# Altium PCB final_sensor_pcb.PcbDoc (part 3 of 3)
Units mm, origin at the board's own origin, x right, y up, seen from the top; angles counter-clockwise.
Board outline 100.5 x 21.64 mm, 2 copper layers (Top Layer, Bottom Layer); 86 components, 53 nets, 234 pads, 76 vias.
Unrouted connection lines stored in the file: 1.
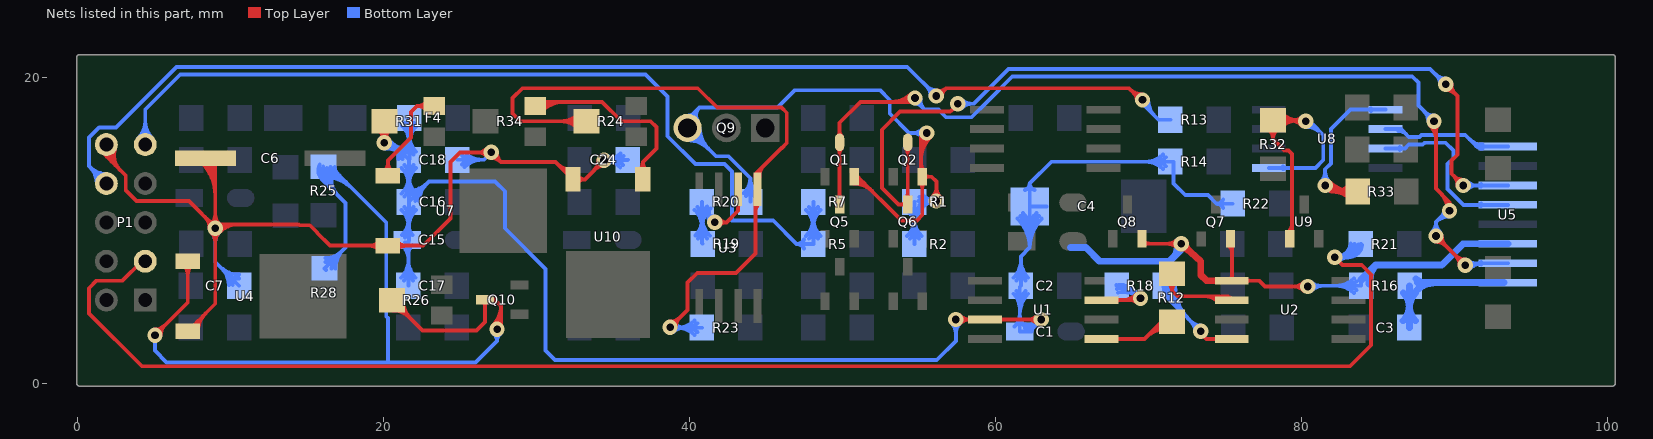
[diagram p3: the nets of this part, all layers, seen from the top]

## Via types
v1: diameter 1, hole 0.5, Top Layer to Bottom Layer, 76 vias

## Nets (pads, with @x,y where several pads share a name; then routed paths per layer and width w, separated by ;. In a path a pad name is that pad's centre, name@x,y a point inside that pad or via, vN(x,y) a via of type N, cw(c..) or ccw(c..) an arc to the next point about the centre after c; other vN are vias at no path point) (continued)
NetQ10_3: Q10.3 R25.1 R26.2 R28.2 U4.1 | length 93.6
  Top Layer w0.254: v1@5.08,3.548 ccw(c5.08,4.448) 5.717,3.812 ccw(c6.353,3.175) v1@5.453,3.175 ; v1@5.269,3.364 7.222,5.317 U4.1@7.222,8 ; U4.1@6.958,7.736 cw(c6.321,7.099) 7.222,7.099 cw(c8.122,7.099) U4.1@7.486,7.736 ; R26.2@20.575,5.461 22.502,3.534 ; R26.2@20.625,4.788 cw(c20.625,3.284) 21.689,4.347 ; R26.2@20.625,5.042 cw(c20.625,4.151) R26.2@21.255,4.781 ; R26.2@21.044,5.461 ccw(c22.176,5.461) 21.376,4.66 ; R26.2@21.298,5.461 ccw(c23.043,5.461) 21.809,4.227 ; 22.556,3.48 26.086,3.48 26.644,4.038 Q10.3@26.644,5.492 26.675,5.461 27.305,5.461 ; Q10.3@26.522,5.37 cw(c26.226,5.074) 26.644,5.074 cw(c27.062,5.074) Q10.3@26.766,5.37 ; Q10.3@26.878,5.562 cw(c27.034,5.298) 27.251,5.515 ; Q10.3@26.919,5.573 cw(c26.919,4.911) 27.387,5.379 ; Q10.3@27.007,5.343 cw(c27.206,5.007) 27.482,5.284 ; Q10.3@27.041,5.37 cw(c27.262,5.149) 27.262,5.461 ; Q10.3@27.062,5.589 ccw(c27.305,5.755) 27.305,5.461 ; v1@27.168,3.82 ccw(c25.918,5.07) 27.686,5.07 ; v1@27.348,3.64 ccw(c26.532,4.456) 27.686,4.456 ; v1(27.432,3.556) 27.559,3.429 27.686,3.556 27.686,5.08 27.305,5.461
  Bottom Layer w0.254: v1@5.08,3.048 5.08,2.159 5.842,1.397 26.035,1.397 27.432,2.794 ; R25.1@15.844,14.321 ccw(c16.636,13.942) 16.015,13.322 ; R25.1@16.073,14.212 ccw(c16.98,13.778) 16.269,13.068 ; R25.1@16.154,13.5 cw(c16.154,10.892) 17.998,12.736 ; R25.1@16.154,13.754 cw(c16.154,11.76) 17.564,13.17 ; R25.1@16.154,14.008 cw(c16.154,12.627) 17.13,13.604 ; R28.2@16.204,7.951 ccw(c16.204,8.842) R28.2@16.834,8.212 ; R28.2@16.204,8.205 ccw(c16.204,9.709) 17.268,8.645 ; R28.2@16.255,7.431 R28.2@16.154,7.532 17.526,8.903 17.526,11.811 16.002,13.335 16.561,13.894 16.561,14.173 20.193,10.541 20.193,4.401 20.312,4.282 20.312,1.405 ; R25.1@16.302,14.102 ccw(c17.323,13.614) 16.523,12.814 ; R25.1@16.532,13.992 ccw(c17.667,13.45) 16.777,12.56 ; R28.2@16.623,7.532 cw(c17.756,7.532) 16.955,8.332 ; R25.1@16.761,13.883 ccw(c18.011,13.285) 17.031,12.306 ; R25.1@16.827,14.173 ccw(c17.468,14.173) 17.015,13.719 ; R28.2@16.877,7.532 cw(c18.623,7.532) 17.389,8.766 ; v1@27.203,3.261 cw(c26.84,2.794) 27.432,2.794 ; v1@27.432,3.429 27.432,2.794 ; v1@27.661,3.261 ccw(c28.024,2.794) 27.432,2.794
  other v1: 5.08,3.175
NetR12_1: R12.1 U2.2 | length 8.4
  Top Layer w0.254: R12.1@71.206,6.608 cw(c70.915,6.071) 71.526,6.071 ; R12.1@71.526,7.2 71.526,6.071 ; R12.1@71.847,6.608 ccw(c72.138,6.071) 71.526,6.071 ; 73.678,5.715 cw(c73.678,4.551) U2.2@74.501,5.374 ; 74.291,5.715 cw(c74.291,5.164) U2.2@74.681,5.554 ; U2.2@75.315,5.461 ccw(c75.018,5.461) 75.228,5.671 ccw(c75.438,5.881) U2.2@75.438,5.584 ; U2.2@75.438,5.461 75.184,5.715 71.882,5.715 71.526,6.071
NetR18_1: R18.1 U2.4 | length 14.8
  Top Layer w0.254: v1(73.406,3.429) 73.406,3.302 73.787,2.921 U2.4@75.438,2.921 ; U2.4@74.501,2.834 ccw(c74.291,2.624) 74.291,2.921 ccw(c74.291,3.218) U2.4@74.501,3.008
  Bottom Layer w0.254: R18.1@70.98,6.351 ccw(c72.177,6.351) 71.331,5.504 ; R18.1@71.069,6.401 71.069,5.766 v1(73.406,3.429) ; R18.1@71.234,6.351 ccw(c73.044,6.351) 71.764,5.071 ; R18.1@71.488,6.351 ccw(c73.912,6.351) 72.198,4.637 ; R18.1@71.742,6.351 ccw(c74.779,6.351) 72.632,4.203 ; v1@73.033,3.429 ccw(c72.133,3.429) 72.769,4.066 ccw(c73.406,4.702) v1@73.406,3.802
NetR19_2: R19.2 R20.1 U3.6 | length 20.4
  Top Layer w0.254: v1(41.656,10.541) 42.418,10.541 ; v1@41.951,10.312 cw(c42.418,9.949) 42.418,10.541 ; v1@41.951,10.77 ccw(c42.418,11.133) 42.418,10.541 ; U3.6@43.093,11.759 cw(c42.883,11.549) 43.18,11.549 cw(c43.477,11.549) U3.6@43.267,11.759 ; U3.6@43.18,12.696 43.18,11.303 42.418,10.541
  Bottom Layer w0.254: R20.1@40.342,11.361 cw(c39.193,10.212) 40.818,10.212 cw(c42.443,10.212) R20.1@41.294,11.361 ; R19.2@40.379,9.67 ccw(c39.321,10.729) 40.818,10.729 ; R20.1@40.522,11.541 cw(c39.806,10.826) 40.818,10.826 cw(c41.829,10.826) R20.1@41.114,11.541 ; R19.2@40.559,9.49 ccw(c39.934,10.115) 40.818,10.115 ; 40.818,10.296 ccw(c41.957,10.296) R19.2@41.151,9.49 ; 40.818,10.909 ccw(c42.57,10.909) R19.2@41.331,9.67 ; R20.1@40.818,11.164 cw(c40.818,10.645) 41.185,11.012 ; R20.1@40.818,11.76 R20.1@40.818,11.887 R20.1@40.818,11.379 ; R19.2@40.855,9.144 40.818,9.181 R20.1@40.818,11.379 ; R20.1@41.161,11.596 ccw(c41.551,11.321) 41.213,10.984 ; v1@41.283,10.541 ccw(c40.383,10.541) 41.019,11.178 ccw(c41.656,11.814) v1@41.656,10.914 ; R20.1@41.368,11.45 ccw(c41.802,11.145) v1@41.427,10.77 ; v1(41.656,10.541) R20.1@40.818,11.379
NetR23_1: R23.1 R24.2 U3.5 | length 58.9
  Top Layer w0.254: 28.448,18.669 28.448,17.653 28.956,17.145 R24.2@33.275,17.145 ; 28.451,18.669 29.086,19.304 40.545,19.304 41.815,18.034 46.026,18.034 46.355,17.705 46.355,15.721 46.041,15.407 46.014,15.407 44.45,13.843 ; R24.2@32.749,16.669 ccw(c31.6,15.52) 31.6,17.145 ccw(c31.6,18.77) R24.2@32.749,17.621 ; R24.2@32.929,16.849 ccw(c32.213,16.133) 32.213,17.145 ccw(c32.213,18.157) R24.2@32.929,17.441 ; v1(38.735,3.683) 39.878,4.826 39.878,6.604 40.513,7.239 43.053,7.239 44.323,8.509 44.323,12.569 U3.5@44.45,12.696 44.45,13.843 ; v1@38.735,4.056 ccw(c38.735,4.956) 39.372,4.32 ccw(c40.008,3.683) v1@39.108,3.683 ; U3.5@44.319,13.546 cw(c44.72,13.546) 44.436,13.829 ; 44.323,11.242 cw(c45.054,11.242) U3.5@44.537,11.759 ; U3.5@44.363,13.633 ccw(c44.153,13.843) 44.45,13.843 ; U3.5@44.537,13.633 cw(c44.747,13.843) 44.45,13.843 ; U3.5@44.573,13.546 cw(c45.587,13.546) 44.87,14.263
  Bottom Layer w0.254: v1(38.735,3.683) 38.76,3.658 R23.1@40.818,3.658 ; v1@38.999,3.419 cw(c39.574,2.844) 39.574,3.658 ; v1@38.999,3.947 ccw(c39.697,4.645) 39.697,3.658 ; R23.1@40.342,3.182 ccw(c39.193,2.033) 39.193,3.658 ccw(c39.193,5.282) R23.1@40.342,4.134 ; R23.1@40.522,3.361 ccw(c39.806,2.646) 39.806,3.658 ccw(c39.806,4.669) R23.1@40.522,3.954
NetR31_3: R31.3 U7.1 | length 9.3
  Top Layer w0.254: U7.1@20.039,13.852 ccw(c19.402,14.488) 20.303,14.488 ccw(c21.203,14.488) U7.1@20.567,13.852 ; U7.1@20.303,13.588 20.303,14.588 21.809,16.094 21.809,17.745 22.209,18.145 ; R31.3@22.853,17.843 ccw(c22.209,17.307) 22.209,18.145 ; R31.3@22.853,18.447 cw(c22.209,18.983) 22.209,18.145 ; R31.3@23.317,18.145 22.209,18.145
NetR32_1: R32.1 U8.5 U9.1 | length 27.7
  Top Layer w0.254: R32.1@77.762,16.658 cw(c77.316,15.977) 78.13,15.977 ; R32.1@78.477,16.925 cw(c79.192,16.21) 79.192,17.221 cw(c79.192,18.233) R32.1@78.477,17.517 ; R32.1@78.499,16.658 ccw(c78.945,15.977) 78.13,15.977 ; R32.1@78.656,16.745 cw(c79.805,15.596) 79.805,17.221 cw(c79.805,18.846) R32.1@78.656,17.697 ; U9.1@79.096,9.857 ccw(c78.454,10.499) 79.361,10.499 ; 79.18,17.221 cw(c79.18,16.061) v1@80,16.881 ; U9.1@79.218,9.46 79.361,9.603 79.361,15.016 79.138,15.239 78.868,15.239 78.13,15.977 ; 79.547,17.221 ccw(c79.547,17.862) v1@80,17.409 ; v1@80.188,17.221 R32.1@78.13,17.221 78.13,15.977
  Bottom Layer w0.254: U8.5@77.855,14.097 80.899,14.097 81.407,14.605 81.407,16.256 80.772,16.891 80.518,16.891 v1(80.264,17.145) ; U8.5@78.792,14.01 cw(c79.002,13.8) 79.002,14.097 cw(c79.002,14.394) U8.5@78.792,14.184 ; v1@80.264,16.772 cw(c80.264,15.258) 81.334,16.329 ; v1@80.264,17.026 cw(c80.264,16.126) 80.901,16.762
NetR33_2: R33.2 U8.1 | length 20.2
  Top Layer w0.254: v1@81.439,12.859 ccw(c82.189,13.609) 82.189,12.548 ; v1(81.534,12.954) 81.94,12.548 R33.2@83.654,12.548 ; v1@81.618,13.038 ccw(c82.802,14.222) 82.802,12.548 ; v1@81.798,13.218 ccw(c83.416,14.836) R33.2@83.416,12.548 ; R33.2@83.178,12.072 ccw(c82.029,10.923) 82.029,12.548 ccw(c82.029,14.172) R33.2@83.178,13.023 ; R33.2@83.358,12.251 ccw(c82.643,11.536) 82.643,12.548 ccw(c82.643,13.559) R33.2@83.358,12.844
  Bottom Layer w0.254: v1@81.27,13.218 ccw(c80.634,13.854) 81.534,13.854 ccw(c82.434,13.854) v1@81.798,13.218 ; v1(81.534,12.954) 81.534,14.014 81.915,14.395 81.915,16.637 83.185,17.907 U8.1@85.471,17.907 ; U8.1@84.534,17.82 ccw(c84.324,17.61) 84.324,17.907 ccw(c84.324,18.204) U8.1@84.534,17.994
NetR34_3: R34.3 U10.1 | length 16.5
  Top Layer w0.254: R34.3@29.996,18.17 cw(c30.588,17.578) R34.3@30.588,18.415 ; R34.3@30.176,17.99 cw(c31.202,16.964) 31.202,18.415 ; R34.3@30.355,17.811 cw(c31.815,16.351) 31.815,18.415 ; R34.3@30.48,18.288 30.607,18.415 34.29,18.415 35.56,17.145 37.465,17.145 37.846,16.764 37.846,15.367 36.956,14.477 ; U10.1@36.71,13.932 ccw(c36.23,14.477) 36.956,14.477 ; U10.1@36.956,13.352 36.956,14.477 ; U10.1@37.202,13.932 cw(c37.682,14.477) 36.956,14.477
OFFSET+: Q1.3 Q5.3 U5.2 | length 82.2
  Top Layer w0.254: Q5.3@49.693,12.107 ccw(c49.398,12.403) 49.815,12.403 ccw(c50.233,12.403) Q5.3@49.937,12.107 ; Q1.3@49.693,15.377 cw(c49.397,15.081) 49.815,15.081 cw(c50.233,15.081) Q1.3@49.937,15.377 ; Q1.3@49.693,16.171 ccw(c49.397,16.467) 49.815,16.467 ccw(c50.233,16.467) Q1.3@49.937,16.171 ; Q5.3@49.815,11.71 Q1.3@49.815,15.774 49.815,17.049 51.181,18.415 54.61,18.415 v1@54.737,18.542 ; 53.223,18.415 ccw(c53.223,20.183) v1@54.473,18.933 ; 53.837,18.415 ccw(c53.837,19.569) v1@54.653,18.753 ; v1@88.382,16.881 cw(c87.439,15.938) 88.773,15.938 ; v1@88.562,17.061 cw(c88.052,16.551) 88.773,16.551 cw(c89.24,16.551) v1@88.91,16.881 ; v1@88.773,9.279 cw(c88.773,8.379) 89.41,9.015 cw(c90.046,9.652) v1@89.146,9.652 ; v1(88.773,9.652) v1(90.678,7.747) ; v1@88.773,17.256 88.773,12.744 89.662,11.855 v1(89.662,11.303) ; 89.069,12.448 cw(c87.924,11.303) v1@89.543,11.303 ; 89.502,12.014 cw(c88.791,11.303) v1@89.797,11.303 ; v1@90.305,7.747 ccw(c89.405,7.747) 90.041,8.384 ccw(c90.678,9.02) v1@90.678,8.12
  Bottom Layer w0.254: v1@54.737,18.296 cw(c54.737,17.702) 55.157,18.122 ; v1@54.737,18.542 55.372,17.907 56.261,17.907 56.761,17.407 58.428,17.407 59.436,18.415 ; v1@55.105,18.607 ccw(c55.824,18.486) 55.308,17.971 ; 59.499,18.479 59.436,18.415 ; v1@88.273,17.145 ccw(c87.373,17.145) 88.009,17.782 ccw(c88.646,18.418) v1@88.646,17.518 ; v1@88.509,9.916 ccw(c87.873,10.552) 88.773,10.552 ccw(c89.673,10.552) v1@89.037,9.916 ; v1(88.646,17.145) 87.622,18.169 87.622,19.669 87.225,20.066 61.087,20.066 59.436,18.415 ; 88.767,10.559 cw(c89.662,9.665) v1@89.662,10.93 ; v1(88.773,9.652) 88.773,10.565 v1@89.586,11.379 ; 89.132,10.924 ccw(c88.753,11.303) v1@89.289,11.303 ; 89.201,10.993 cw(c89.662,10.532) v1@89.662,11.184 ; v1(90.678,7.747) 90.551,7.874 U5.2@93.472,7.874 ; v1@90.762,7.663 cw(c91.272,7.153) 91.272,7.874 cw(c91.272,8.341) v1@90.942,8.011 ; v1@90.942,7.483 cw(c91.885,6.54) U5.2@91.885,7.874 ; U5.2@91.73,7.787 ccw(c91.52,7.577) 91.52,7.874 ccw(c91.52,8.171) U5.2@91.73,7.961
  other v1: 54.737,18.669
OFFSET-: Q2.3 Q6.3 U5.6 | length 69
  Top Layer w0.254: Q6.3@54.138,11.588 ccw(c53.842,11.292) 53.842,11.71 ccw(c53.842,12.128) Q6.3@54.138,11.832 ; Q6.3@54.138,12.107 ccw(c53.842,12.403) 54.26,12.403 ccw(c54.678,12.403) Q6.3@54.382,12.107 ; Q2.3@54.138,15.377 cw(c53.842,15.081) 54.26,15.081 cw(c54.678,15.081) Q2.3@54.382,15.377 ; Q6.3@54.26,11.71 53.651,11.71 52.578,12.783 52.578,16.593 53.765,17.78 57.007,17.78 57.015,17.772 v1@57.515,18.145 ; Q6.3@54.26,11.71 Q2.3@54.26,15.774 ; v1@89.408,19.185 cw(c89.408,18.285) 90.045,18.921 cw(c90.681,19.558) v1@89.781,19.558 ; v1(89.408,19.558) 90.17,18.796 90.17,14.962 89.789,14.581 89.789,13.716 v1(90.551,12.954) v1@90.297,13.208 ; v1@90.178,12.954 ccw(c89.278,12.954) 89.914,13.591 ccw(c90.551,14.227) v1@90.551,13.327
  Bottom Layer w0.254: v1(57.531,18.288) 58.547,18.288 60.833,20.574 88.392,20.574 v1(89.408,19.558) ; v1@57.795,18.024 cw(c58.431,17.388) 58.431,18.288 cw(c58.431,19.188) v1@57.795,18.552 ; v1@89.035,19.558 ccw(c88.135,19.558) 88.771,20.195 ccw(c89.408,20.831) v1@89.408,19.931 ; v1(90.551,12.954) U5.6@93.472,12.954 ; v1@90.815,12.69 cw(c91.451,12.054) 91.451,12.954 cw(c91.451,13.854) v1@90.815,13.218 ; U5.6@91.73,12.867 ccw(c91.52,12.657) 91.52,12.954 ccw(c91.52,13.251) U5.6@91.73,13.041
OP_OUT: Q1.2 Q2.2 Q9.3 R1.2 R2.2 R20.2 | length 78.5
  Top Layer w0.254: Q1.2@50.765,13.076 cw(c50.765,11.446) 51.917,12.599 ; Q1.2@50.765,13.33 cw(c50.765,12.314) 51.484,13.032 ; Q1.2@50.765,13.524 50.992,13.524 53.848,10.668 54.864,10.668 55.21,11.014 Q2.2@55.21,13.524 ; Q1.2@50.765,13.584 cw(c50.765,13.181) Q1.2@51.05,13.466 ; Q2.2@55.088,13.127 cw(c54.792,12.831) 55.21,12.831 cw(c55.628,12.831) Q2.2@55.332,13.127 ; 55.118,14.439 ccw(c55.85,14.439) Q2.2@55.332,13.921 ; 55.118,14.563 cw(c57.319,14.563) v1@55.763,16.119 ; 55.118,15.176 cw(c56.706,15.176) v1@55.583,16.299 ; 55.118,15.789 cw(c56.093,15.789) v1@55.404,16.478 ; v1@55.118,16.129 55.118,13.616 Q2.2@55.21,13.524 ; Q2.2@55.332,13.402 cw(c55.628,13.106) 55.628,13.524 cw(c55.628,13.942) Q2.2@55.332,13.646 ; v1@55.87,12.202 ccw(c55.234,12.838) 56.134,12.838 ccw(c57.034,12.838) v1@56.398,12.202 ; v1(56.134,11.938) 56.134,13.208 55.818,13.524 Q2.2@55.21,13.524
  Bottom Layer w0.254: Q9.3@39.878,15.915 cw(c39.878,13.988) 41.24,15.351 cw(c42.603,16.713) Q9.3@40.676,16.713 ; Q9.3@39.878,16.169 cw(c39.878,14.856) 40.807,15.784 cw(c41.735,16.713) Q9.3@40.422,16.713 ; Q9.3@39.878,17.018 Q9.3@39.878,16.713 ; Q9.3@39.878,17.511 ccw(c39.878,18.088) 40.286,17.68 ; Q9.3@40.121,16.871 cw(c40.603,17.184) 40.197,17.591 ; Q9.3@40.334,17.01 cw(c40.872,17.359) 40.418,17.812 ; Q9.3@40.547,17.148 cw(c41.14,17.534) 40.64,18.034 ; R20.2@43.537,12.443 ccw(c42.677,13.423) 43.981,13.423 ; R20.2@43.704,12.252 ccw(c43.169,12.862) 43.981,12.862 ccw(c44.793,12.862) R20.2@44.257,12.252 ; R20.2@43.981,11.887 43.981,13.423 ; R20.2@44.425,12.443 cw(c45.285,13.423) 43.981,13.423 ; R2.2@54.222,9.654 ccw(c53.073,10.802) 54.698,10.802 ccw(c56.323,10.802) R2.2@55.174,9.654 ; R1.2@54.222,11.361 cw(c53.073,10.212) 54.698,10.212 cw(c56.323,10.212) R1.2@55.174,11.361 ; R2.2@54.402,9.474 ccw(c53.687,10.189) 54.698,10.189 ccw(c55.71,10.189) R2.2@54.994,9.474 ; R1.2@54.402,11.541 cw(c53.687,10.826) 54.698,10.826 cw(c55.71,10.826) R1.2@54.994,11.541 ; R2.2@54.698,9.128 R1.2@54.698,11.887 ; R1.2@54.952,11.938 v1(56.134,11.938) ; R1.2@55.021,11.669 cw(c55.593,11.194) 55.593,11.938 ; R1.2@55.02,12.206 ccw(c55.591,12.682) 55.591,11.938 ; v1@55.118,16.383 54.356,16.383 53.086,17.653 53.086,18.542 52.451,19.177 46.907,19.177 45.764,18.034 40.64,18.034 ; R1.2@55.215,12.368 ccw(c56.134,13.134) v1(56.134,11.938) ; R1.2@55.216,11.507 cw(c56.134,10.745) v1(56.134,11.938) ; v1@55.235,16.119 ccw(c54.599,15.483) 54.599,16.383 ccw(c54.599,17.283) v1@55.235,16.647 ; v1@55.87,11.674 ccw(c55.234,11.038) 55.234,11.938 ccw(c55.234,12.838) v1@55.87,12.202 ; Q9.3@39.878,16.713 41.732,14.859 42.545,14.859 43.981,13.423 ; Q9.3@39.878,16.713 39.878,17.272 40.64,18.034
  other v1: 55.499,16.383
OUT_N: U5.8 U8.2 | length 12.8
  Bottom Layer w0.254: U8.2@85.471,16.637 86.487,16.637 86.995,16.129 87.698,16.129 87.817,16.248 90.686,16.248 91.44,15.494 U5.8@93.472,15.494 U5.8@91.694,15.494 ; U8.2@86.321,16.514 cw(c86.321,15.816) 86.814,16.31 ; 90.963,15.971 ccw(c91.817,16.824) U5.8@91.817,15.617 ; 91.397,15.537 ccw(c91.817,15.957) U5.8@91.817,15.363 ; U5.8@91.73,15.407 ccw(c91.52,15.197) 91.52,15.494 ccw(c91.52,15.791) U5.8@91.73,15.581
OUT_P: U5.5 U8.3 | length 12.8
  Bottom Layer w0.254: U8.3@85.471,15.367 86.741,15.367 86.995,15.621 87.908,15.621 88.027,15.74 89.416,15.74 89.916,15.24 89.916,14.732 89.535,14.351 89.535,12.724 90.575,11.684 U5.5@93.472,11.684 ; U8.3@86.408,15.28 cw(c86.618,15.07) 86.618,15.367 cw(c86.618,15.664) U8.3@86.408,15.454 ; U5.5@91.73,11.597 ccw(c91.52,11.387) 91.52,11.684 ccw(c91.52,11.981) U5.5@91.73,11.771
OUT_RESET: R12.2 U1.5 | length 9.7
  Top Layer w0.254: U1.5@66.925,2.921 69.723,2.921 70.839,4.037 R12.2@71.526,4.037 ; U1.5@67.862,2.834 cw(c68.072,2.624) 68.072,2.921 cw(c68.072,3.218) U1.5@67.862,3.008 ; 69.801,2.999 cw(c71.309,1.49) R12.2@71.449,3.619 ; 70.197,3.395 cw(c71.358,2.234) R12.2@71.466,3.873 ; 70.594,3.792 cw(c71.407,2.978) R12.2@71.482,4.126
OUT_SET: R18.2 U1.7 | length 12.5
  Top Layer w0.254: U1.7@66.925,5.461 69.342,5.461 v1(69.469,5.588) ; U1.7@67.862,5.374 cw(c68.072,5.164) 68.072,5.461 cw(c68.072,5.758) U1.7@67.862,5.548 ; 68.262,5.461 ccw(c68.262,6.795) v1@69.205,5.852 ; v1@69.205,5.324 ccw(c68.875,4.994) 68.875,5.461 ccw(c68.875,6.182) v1@69.385,5.672
  Bottom Layer w0.254: R18.2@67.885,6.437 cw(c68.14,5.381) 68.908,6.149 ; R18.2@67.906,6.401 68.656,6.401 v1(69.469,5.588) ; R18.2@67.945,6.19 cw(c68.264,4.865) v1@69.228,5.829 ; R18.2@68.004,5.943 cw(c68.389,4.348) v1@69.549,5.508 ; v1@69.096,5.588 ccw(c68.196,5.588) 68.832,6.225 ccw(c69.469,6.861) v1@69.469,5.961
P_CURRENT: P1.9 R5.2 R7.2 | length 70.9
  Bottom Layer w0.254: P1.9@4.004,16.062 ccw(c2.941,17.125) 4.445,17.125 ccw(c5.949,17.125) P1.9@4.886,16.062 ; P1.9@4.184,15.882 ccw(c3.554,16.512) 4.445,16.512 ccw(c5.336,16.512) P1.9@4.706,15.882 ; P1.9@4.445,15.621 4.445,17.907 6.731,20.193 37.139,20.193 38.572,18.76 38.572,16.165 40.386,14.351 42.291,14.351 42.787,13.855 42.787,10.656 45.478,10.656 47.006,9.128 ; R5.2@47.492,8.827 ccw(c47.006,8.585) 47.006,9.128 ; R5.2@47.492,9.428 cw(c47.006,9.67) 47.006,9.128 ; R5.2@47.618,9.654 ccw(c46.469,10.802) 48.094,10.802 ccw(c49.719,10.802) R5.2@48.57,9.654 ; R7.2@47.618,11.361 cw(c46.469,10.212) 48.094,10.212 cw(c49.719,10.213) R7.2@48.57,11.361 ; R5.2@47.798,9.474 ccw(c47.083,10.189) 48.094,10.189 ccw(c49.106,10.189) R5.2@48.39,9.474 ; R7.2@47.798,11.541 cw(c47.082,10.826) 48.094,10.826 cw(c49.106,10.826) R7.2@48.39,11.541 ; R7.2@48.094,11.887 R5.2@48.094,9.128 47.006,9.128
RESET: P1.8 R13.1 | length 87.6
  Top Layer w0.254: v1@56.228,19.157 ccw(c56.37,19.703) 56.769,19.304 ; v1@56.261,18.796 56.769,19.304 ; v1@56.507,18.796 cw(c57.101,18.796) 56.681,19.216 ; 68.771,19.24 ccw(c69.557,20.027) v1@69.586,18.915 ; 69.049,18.962 cw(c68.629,18.542) v1@69.223,18.542 ; v1@69.342,18.669 v1@69.469,18.542 ; v1@69.596,18.415 v1@69.469,18.542 ; 56.769,19.304 68.707,19.304 v1@69.469,18.542
  Bottom Layer w0.254: P1.8@1.282,13.081 ccw(c-0.222,13.081) 0.841,14.145 ccw(c1.905,15.208) P1.8@1.905,13.704 ; P1.8@1.536,13.081 ccw(c0.645,13.081) 1.275,13.711 ccw(c1.905,14.341) P1.8@1.905,13.45 ; P1.8@1.905,13.081 0.762,14.224 0.762,16.077 1.437,16.752 2.528,16.752 6.477,20.701 54.229,20.701 v1(56.134,18.796) ; v1@55.761,18.796 ccw(c54.861,18.796) 55.497,19.433 ccw(c56.134,20.069) v1@56.134,19.169 ; v1(69.596,18.542) 69.596,18.415 69.723,18.288 69.723,18.161 70.637,17.247 R13.1@71.423,17.247 ; v1@69.715,18.542 ccw(c70.615,18.542) 69.979,17.905 ; v1@69.969,18.542 ccw(c71.483,18.542) 70.412,17.472
SET: P1.3 R21.1 | length 108.3
  Top Layer w0.254: P1.3@4.445,8.001 4.228,8.001 2.958,6.731 1.27,6.731 0.774,6.235 0.774,4.597 4.228,1.143 83.165,1.143 84.535,2.513 84.535,7.065 84.572,7.102 83.927,7.747 82.677,7.747 v1(82.169,8.255)
  Bottom Layer w0.254: v1@82.448,8.008 cw(c82.998,7.52) 82.998,8.255 ; v1@82.448,8.502 ccw(c82.998,8.99) 82.998,8.255 ; v1@82.458,8.255 ccw(c82.458,9.261) R21.1@83.455,9.131 ; 82.747,8.255 ccw(c82.747,9.223) R21.1@83.707,9.099 ; 83.036,8.255 ccw(c83.036,9.186) R21.1@83.959,9.066 ; R21.1@83.203,9.164 cw(c82.169,9.298) v1(82.169,8.255) 82.998,8.255 ; R21.1@83.871,9.128 82.998,8.255
SGND: C1.2 C2.2 C4.2 C15.2 C16.1 C17.1 C18.1 F4.2 Q7.2 Q8.2 R14.1 R16.2 R22.1 R31.2 U1.3 U2.1 U5.3 | length 228.6
  Top Layer w0.254: R31.2@19.648,16.618 cw(c18.956,15.749) v1(20.066,15.748) ; v1@19.802,16.012 ccw(c19.163,16.651) R31.2@20.067,16.651 ; R31.2@19.806,16.817 cw(c19.375,16.276) 20.067,16.276 cw(c20.759,16.276) R31.2@20.328,16.817 ; v1(20.066,15.748) v1(20.066,15.748) ; R31.2@20.067,16.646 ccw(c20.964,16.646) v1@20.33,16.012 ; R31.2@20.067,17.145 v1(20.066,15.748) ; R31.2@20.486,16.618 ccw(c21.178,15.749) v1(20.066,15.748) ; v1(57.404,4.191) U1.3@59.309,4.191 v1(62.992,4.191) ; v1@57.668,3.927 cw(c58.305,3.29) 58.305,4.191 cw(c58.304,5.091) v1@57.668,4.455 ; U1.3@58.372,4.104 ccw(c58.162,3.894) 58.162,4.191 ccw(c58.162,4.488) U1.3@58.372,4.278 ; U1.3@60.246,4.104 cw(c60.456,3.894) 60.456,4.191 cw(c60.456,4.488) U1.3@60.246,4.278 ; v1@62.728,3.927 ccw(c62.091,3.29) 62.091,4.191 ccw(c62.092,5.091) v1@62.728,4.455 ; Q8.2@69.683,9.063 cw(c69.88,8.866) 69.88,9.144 ; Q8.2@69.683,9.307 ccw(c70.078,9.702) 70.078,9.144 ; Q8.2@69.75,9.144 v1(72.136,9.144) ; v1@71.872,8.88 ccw(c71.236,8.244) 71.236,9.144 ccw(c71.236,10.044) v1@71.872,9.408 ; Q7.2@75.217,9.063 cw(c74.684,8.53) 75.438,8.53 ; Q7.2@75.339,9.46 75.438,9.361 U2.1@75.438,6.731 77.216,6.731 77.597,6.35 v1(80.391,6.35) ; U2.1@75.351,6.818 ccw(c75.141,7.028) 75.438,7.028 ccw(c75.735,7.028) U2.1@75.525,6.818 ; U2.1@76.375,6.644 cw(c76.585,6.434) 76.585,6.731 cw(c76.585,7.028) U2.1@76.375,6.818 ; v1@80.127,6.086 ccw(c79.491,5.45) 79.491,6.35 ccw(c79.491,7.25) v1@80.127,6.614
  Top Layer w0.45: v1(72.136,9.144) 73.406,8.001 73.406,7.112 73.787,6.731 U2.1@75.438,6.731 ; v1@72.15,8.869 cw(c72.185,8.206) 72.629,8.7 cw(c73.074,9.193) v1@72.411,9.158
  Bottom Layer w0.254: v1@20.066,15.375 cw(c20.066,13.305) C18.1@21.529,14.769 ; v1@20.066,15.629 cw(c20.066,14.173) C18.1@21.096,15.202 ; v1(20.066,15.748) 20.55,15.748 C18.1@21.668,14.63 C16.1@21.668,11.887 ; v1@20.066,15.883 cw(c20.066,15.04) 20.662,15.636 ; C18.1@20.958,15.34 ccw(c21.552,15.934) C18.1@21.629,15.098 ; C18.1@20.995,14.69 ccw(c19.562,14.71) 20.575,15.723 ccw(c21.487,16.635) C18.1@21.606,15.351 ; C18.1@21.001,15.298 cw(c20.401,14.698) C18.1@21.249,14.686 ; C17.1@21.165,6.927 ccw(c20.016,8.076) 21.641,8.076 ccw(c23.266,8.076) C17.1@22.117,6.927 ; C16.1@21.192,11.361 cw(c20.043,10.213) 21.668,10.213 cw(c23.293,10.213) C16.1@22.144,11.361 ; C16.1@21.192,12.413 ccw(c20.043,13.562) 21.668,13.562 ccw(c23.293,13.562) C16.1@22.144,12.413 ; C18.1@21.192,14.105 cw(c20.043,12.956) 21.668,12.956 cw(c23.293,12.956) C18.1@22.144,14.105 ; C18.1@21.192,15.156 ccw(c19.953,16.396) 21.705,16.396 ; F4.2@21.229,16.848 cw(c20.08,15.699) 21.705,15.699 cw(c23.33,15.699) F4.2@22.181,16.848 ; C15.2@21.23,9.06 cw(c20.239,8.068) 21.641,8.068 ; C15.2@21.23,9.728 ccw(c20.173,10.785) 21.668,10.785 ; C17.1@21.345,6.747 ccw(c20.629,7.462) 21.641,7.462 ccw(c22.652,7.462) C17.1@21.937,6.747 ; C16.1@21.372,11.541 cw(c20.656,10.826) 21.668,10.826 cw(c22.679,10.826) C16.1@21.964,11.541 ; C16.1@21.372,12.234 ccw(c20.656,12.949) 21.668,12.949 ccw(c22.679,12.949) C16.1@21.964,12.234 ; C18.1@21.372,14.284 cw(c20.656,13.569) 21.668,13.569 cw(c22.679,13.569) C18.1@21.964,14.284 ; C18.1@21.372,14.977 ccw(c20.566,15.782) 21.705,15.782 ; F4.2@21.409,17.027 cw(c20.694,16.312) 21.705,16.312 cw(c22.717,16.312) F4.2@22.001,17.027 ; C15.2@21.41,9.239 cw(c20.852,8.681) 21.641,8.681 ; C15.2@21.41,9.549 ccw(c20.787,10.172) 21.668,10.172 ; C17.1@21.641,6.401 C15.2@21.641,9.318 ; 21.641,8.436 cw(c22.522,8.436) C15.2@21.899,9.06 ; C15.2@21.668,9.345 C16.1@21.668,11.887 ; 21.668,10.287 ccw(c22.457,10.287) C15.2@21.899,9.728 ; C16.1@21.668,12.356 ccw(c21.668,13.489) 22.468,12.688 ; C16.1@21.668,12.61 ccw(c21.668,14.356) 22.902,13.122 ; C18.1@21.705,14.668 F4.2@21.705,17.374 ; 21.705,15.602 ccw(c22.589,15.602) C18.1@21.964,14.977 ; 21.705,16.215 ccw(c23.202,16.215) C18.1@22.144,15.156 ; C16.1@22.087,11.937 cw(c22.978,11.937) C16.1@22.348,12.567 ; C16.1@22.341,11.937 cw(c23.845,11.937) 22.781,13.001 ; v1@57.14,3.927 cw(c56.504,3.291) 57.404,3.291 cw(c58.304,3.291) v1@57.668,3.927 ; v1(57.404,4.191) 57.404,2.794 56.157,1.547 31.219,1.547 30.607,2.159 30.607,7.493 27.94,10.16 27.94,12.573 27.305,13.208 22.988,13.208 C16.1@21.668,11.887 ; C2.2@61.182,5.875 cw(c60.216,4.909) 61.582,4.909 ; C2.2@61.182,6.927 ccw(c60.033,8.076) 61.658,8.076 ccw(c63.283,8.076) C2.2@62.134,6.927 ; C1.2@61.248,3.742 ccw(c60.44,4.55) 61.582,4.55 ccw(c62.724,4.55) C1.2@61.917,3.742 ; C2.2@61.362,6.054 cw(c60.829,5.522) 61.582,5.522 ; C2.2@61.362,6.747 ccw(c60.646,7.462) 61.658,7.462 ccw(c62.669,7.462) C2.2@61.954,6.747 ; C4.2@61.44,10.784 cw(c59.564,8.89) 62.23,8.89 ; 61.582,4.543 cw(c63.465,4.543) C2.2@62.134,5.875 ; 61.582,5.157 cw(c62.852,5.157) C2.2@61.954,6.054 ; C4.2@61.619,10.965 cw(c60.167,9.499) 62.23,9.499 cw(c64.293,9.499) C4.2@62.841,10.965 ; C4.2@61.797,11.145 cw(c60.77,10.108) 62.23,10.108 cw(c63.69,10.108) C4.2@62.663,11.145 ; C4.2@61.915,12.66 ccw(c61.792,13.081) 62.23,13.081 ; C1.2@61.922,3.623 ccw(c62.071,4.429) v1@62.65,3.849 ; C1.2@61.968,3.873 ccw(c62.177,5.006) v1(62.992,4.191) 62.209,3.408 C1.2@61.582,3.408 61.582,6.325 C2.2@61.658,6.401 61.658,8.318 62.23,8.89 ; C1.2@62.355,3.408 cw(c62.709,3.408) C1.2@62.459,3.658 ; C4.2@62.545,12.66 cw(c62.668,13.081) 62.23,13.081 ; v1@62.619,4.191 cw(c61.719,4.191) 62.355,3.554 cw(c62.992,2.918) v1@62.992,3.818 ; C4.2@63.02,10.784 ccw(c64.896,8.89) 62.23,8.89 ; C4.2@63.348,11.582 C4.2@62.23,11.582 ; R14.1@70.948,14.027 ccw(c69.799,12.879) 69.799,14.503 ccw(c69.799,16.128) R14.1@70.948,14.979 ; R14.1@71.127,14.207 ccw(c70.412,13.492) 70.412,14.503 ccw(c70.412,15.515) R14.1@71.127,14.8 ; R22.1@74.878,11.475 ccw(c74.429,11.265) 74.429,11.76 ; R22.1@74.878,12.045 cw(c74.429,12.255) 74.429,11.76 ; R22.1@75.487,11.76 74.429,11.76 ; v1(80.391,6.35) 80.772,6.35 80.823,6.401 R16.2@83.883,6.401 R16.2@83.883,6.794 ; v1@80.655,6.086 cw(c81.414,5.327) 81.414,6.401 ; v1@80.655,6.614 ccw(c81.169,7.128) 81.169,6.401 ; R16.2@83.407,5.925 ccw(c82.258,4.776) 82.258,6.401 ccw(c82.258,8.025) R16.2@83.407,6.876 ; R16.2@83.587,6.104 ccw(c82.871,5.389) 82.871,6.401 ccw(c82.871,7.412) R16.2@83.587,6.697 ; 62.23,8.89 C4.2@62.23,11.582 ; C4.2@62.23,11.582 62.23,13.081 ; 62.23,13.081 63.652,14.503 R14.1@71.423,14.503 71.628,14.503 71.628,13.081 72.39,12.319 73.87,12.319 74.429,11.76
  Bottom Layer w0.45: 64.897,8.89 65.913,8.89 66.802,8.001 71.374,8.001 72.136,8.763 v1(72.136,9.144) ; 71.565,8.192 ccw(c70.812,8.944) v1@71.864,9.103 ; 84.836,7.747 89.154,7.747 90.551,9.144 U5.3@93.472,9.144
  Bottom Layer w0.5: R16.2@83.883,6.794 84.836,7.747 ccw(c85.856,6.727) R16.2@84.428,6.527
SR+: C3.2 R16.1 U5.1 | length 15
  Bottom Layer w0.254: R16.1@87.034,6.388 R16.1@87.046,6.401
  Bottom Layer w0.45: C3.2@86.627,4.114 ccw(c85.646,5.096) 87.034,5.096 ccw(c88.422,5.096) C3.2@87.44,4.114 ; R16.1@86.639,5.944 cw(c85.687,4.991) 87.034,4.991 ; C3.2@87.034,3.658 R16.1@87.034,6.388 ; 87.034,4.933 cw(c88.463,4.933) R16.1@87.452,5.944 ; R16.1@87.452,6.044 cw(c88.804,4.692) 88.804,6.604 ; R16.1@87.452,6.857 ccw(c88.064,7.468) 88.064,6.604 ; R16.1@87.554,6.604 U5.1@93.218,6.604
VCC_IN: C6.1 C7.2 C18.2 C24.2 P1.10 U4.3 U7.3 U10.3 | length 108.5
  Top Layer w0.254: P1.10@1.775,15.67 ccw(c2.538,15.38) 1.961,14.803 ; P1.10@1.905,15.621 1.905,14.859 3.175,13.589 3.175,12.635 3.872,11.938 7.295,11.938 9.017,10.216 v1(9.017,10.16) ; P1.10@2.013,15.58 ccw(c2.941,15.228) 2.239,14.525 ; P1.10@2.25,15.49 ccw(c3.343,15.075) 2.516,14.248 ; P1.10@2.487,15.4 ccw(c3.746,14.922) 2.794,13.97 ; U4.3@7.222,3.43 9.017,5.225 v1(9.017,10.16) ; U4.3@7.641,3.43 cw(c8.653,3.43) 7.937,4.145 ; U4.3@7.895,3.43 cw(c9.52,3.43) 8.371,4.579 ; C6.1@8.118,14.468 cw(c5.948,12.298) 9.017,12.298 ; C6.1@8.298,14.648 cw(c6.562,12.912) 9.017,12.912 ; 8.341,10.892 cw(c7.608,10.16) v1@8.644,10.16 ; C6.1@8.382,14.732 8.763,14.732 9.017,14.478 v1@9.017,10.287 ; 8.476,10.757 ccw(c9.017,11.298) v1@9.017,10.533 ; C6.1@8.477,14.827 cw(c7.175,13.525) 9.017,13.525 ; C6.1@8.657,15.007 cw(c7.788,14.138) 9.017,14.138 ; v1@8.753,9.896 cw(c8.117,9.26) 9.017,9.26 cw(c9.917,9.26) 9.281,9.896 cw(c10.531,8.646) 10.531,10.414 ; v1@8.753,10.424 ccw(c8.117,11.06) 9.017,11.06 ccw(c9.917,11.06) v1@9.281,10.424 ; v1@9.101,10.076 cw(c9.917,9.26) 9.917,10.414 ; U7.3@19.739,8.754 ccw(c19.102,8.118) 19.102,9.018 ccw(c19.102,9.919) U7.3@19.739,9.282 ; U7.3@20.867,8.754 cw(c21.503,8.118) 21.503,9.018 cw(c21.503,9.919) U7.3@20.867,9.282 ; v1@26.787,14.849 ccw(c26.151,14.213) 26.151,15.113 ccw(c26.151,16.013) v1@26.787,15.377 ; v1@27.052,14.74 cw(c27.054,13.846) 27.686,14.478 ; v1@27.424,15.112 ccw(c28.318,15.11) 27.686,14.478 ; 31.41,14.328 ccw(c32.178,15.095) U10.3@32.333,14.021 ; 31.769,13.969 ccw(c32.268,14.469) U10.3@32.369,13.77 ; U10.3@32.677,13.118 cw(c33.164,12.727) 33.164,13.352 ; U10.3@32.677,13.586 ccw(c33.164,13.977) 33.164,13.352 ; v1@34.044,14.605 cw(c33.144,14.605) 33.78,13.968 cw(c34.417,13.332) v1@34.417,14.232 ; v1(34.417,14.605) 33.164,13.352 ; v1(9.017,10.16) v1@9.017,10.287 ; v1@9.017,10.287 9.144,10.414 14.454,10.414 14.516,10.352 15.202,10.352 15.686,9.868 15.686,9.841 16.509,9.018 22.607,9.018 24.384,10.795 24.384,14.478 25.019,15.113 v1(27.051,15.113) 27.686,14.478 ; 27.686,14.478 31.26,14.478 U10.3@32.386,13.352 33.164,13.352
  Bottom Layer w0.254: v1@8.753,9.896 cw(c8.117,9.26) 9.017,9.26 cw(c9.917,9.26) v1@9.281,9.896 ; v1(9.017,10.16) 9.017,7.964 C7.2@10.58,6.401 ; 9.346,7.635 ccw(c10.58,8.869) C7.2@10.58,7.124 ; 9.466,7.514 cw(c8.403,6.451) C7.2@9.907,6.451 ; 9.779,7.202 ccw(c10.58,8.002) C7.2@10.58,6.87 ; C7.2@9.9,7.081 cw(c9.27,6.451) C7.2@10.161,6.451 ; C18.2@24.831,14.63 26.568,14.63 v1(27.051,15.113) ; C18.2@25.127,14.334 cw(c25.842,13.619) 25.842,14.63 cw(c25.842,15.642) C18.2@25.127,14.927 ; C18.2@25.307,14.155 cw(c26.456,13.006) 26.456,14.63 cw(c26.456,16.255) C18.2@25.307,15.106 ; v1@34.681,14.341 cw(c35.317,13.705) 35.317,14.605 cw(c35.317,15.505) v1@34.681,14.869 ; 34.986,14.605 cw(c34.986,13.689) C24.2@35.668,14.301 ; 35.029,14.605 ccw(c35.029,15.529) C24.2@35.683,14.876 ; C24.2@35.479,14.131 ccw(c34.417,13.179) v1(34.417,14.605) ; C24.2@35.503,15.056 cw(c34.417,16.139) v1(34.417,14.605) ; C24.2@35.98,14.63 35.954,14.605 v1(34.417,14.605)
pads on no net: U1.1 U1.8 U3.1 U3.2 U3.3 U6.1 U6.6 U6.7 U9.3
copper on no net: | length 41.9
  Top Layer w0.025: 1.422,20.32 1.651,20.32 ; 1.422,20.345 1.626,20.345 ; 1.422,20.371 1.626,20.371 ; 1.422,20.396 1.626,20.396 ; 1.422,20.422 1.626,20.422 ; 1.422,20.447 1.626,20.447 ; 1.422,20.472 1.626,20.472 ; 1.422,20.498 1.626,20.498 ; 1.448,20.117 1.676,20.117 ; 1.448,20.142 1.651,20.142 ; 1.448,20.168 1.651,20.168 ; 1.448,20.193 1.651,20.193 ; 1.448,20.218 1.651,20.218 ; 1.448,20.244 1.651,20.244 ; 1.448,20.269 1.651,20.269 ; 1.448,20.295 1.651,20.295 ; 1.473,19.939 1.676,19.939 ; 1.473,19.964 1.676,19.964 ; 1.473,19.99 1.676,19.99 ; 1.473,20.015 1.676,20.015 ; 1.473,20.041 1.676,20.041 ; 1.473,20.066 1.676,20.066 ; 1.473,20.091 1.676,20.091 ; 1.499,19.761 1.702,19.761 ; 1.499,19.787 1.702,19.787 ; 1.499,19.812 1.702,19.812 ; 1.499,19.837 1.702,19.837 ; 1.499,19.863 1.702,19.863 ; 1.499,19.888 1.702,19.888 ; 1.499,19.914 1.676,19.914 ; 1.524,19.583 1.854,19.583 ; 1.524,19.609 1.854,19.609 ; 1.524,19.634 1.88,19.634 ; 1.524,19.66 1.88,19.66 ; 1.524,19.685 1.905,19.685 ; 1.524,19.71 1.93,19.71 ; 1.524,19.736 1.702,19.736 ; 1.549,19.507 1.803,19.507 ; 1.549,19.533 1.829,19.533 ; 1.549,19.558 1.829,19.558 ; 1.753,19.736 1.93,19.736 ; 1.753,19.761 1.956,19.761 ; 1.778,19.787 1.956,19.787 ; 1.778,19.812 1.981,19.812 ; 1.803,19.837 1.981,19.837 ; 1.803,19.863 2.007,19.863 ; 1.829,19.888 2.007,19.888 ; 1.829,19.914 2.032,19.914 ; 1.854,19.939 2.032,19.939 ; 1.854,19.964 2.057,19.964 ; 1.88,19.99 2.083,19.99 ; 1.88,20.015 2.083,20.015 ; 1.905,20.041 2.108,20.041 ; 1.905,20.066 2.108,20.066 ; 1.93,20.091 2.134,20.091 ; 1.93,20.117 2.134,20.117 ; 1.956,20.142 2.159,20.142 ; 1.956,20.168 2.159,20.168 ; 1.981,20.193 2.184,20.193 ; 1.981,20.218 2.184,20.218 ; 2.007,20.244 2.21,20.244 ; 2.007,20.269 2.21,20.269 ; 2.032,20.295 2.235,20.295 ; 2.032,20.32 2.261,20.32 ; 2.057,20.345 2.261,20.345 ; 2.057,20.371 2.286,20.371 ; 2.083,20.396 2.286,20.396 ; 2.083,20.422 2.311,20.422 ; 2.108,20.447 2.311,20.447 ; 2.108,20.472 2.337,20.472 ; 2.134,20.498 2.337,20.498 ; 2.286,19.507 2.896,19.507 ; 2.286,19.533 2.921,19.533 ; 2.286,19.558 2.921,19.558 ; 2.311,19.583 2.921,19.583 ; 2.311,19.609 2.921,19.609 ; 2.337,19.634 2.921,19.634 ; 2.438,20.218 2.489,20.218 ; 2.438,20.244 2.54,20.244 ; 2.438,20.269 2.591,20.269 ; 2.438,20.295 2.642,20.295 ; 2.464,20.32 2.87,20.32 ; 2.464,20.345 2.87,20.345 ; 2.515,20.371 2.896,20.371 ; 2.54,19.66 2.743,19.66 ; 2.54,19.685 2.743,19.685 ; 2.54,19.71 2.743,19.71 ; 2.54,20.396 2.896,20.396 ; 2.565,19.736 2.769,19.736 ; 2.565,19.761 2.769,19.761 ; 2.565,19.787 2.769,19.787 ; 2.565,19.812 2.769,19.812 ; 2.565,19.837 2.769,19.837 ; 2.591,19.863 2.794,19.863 ; 2.591,19.888 2.794,19.888 ; 2.591,19.914 2.794,19.914 ; 2.591,19.939 2.794,19.939 ; 2.591,19.964 2.794,19.964 ; 2.591,20.422 2.896,20.422 ; 2.616,19.99 2.819,19.99 ; 2.616,20.015 2.819,20.015 ; 2.616,20.041 2.819,20.041 ; 2.616,20.066 2.819,20.066 ; 2.616,20.091 2.819,20.091 ; 2.642,20.117 2.845,20.117 ; 2.642,20.142 2.845,20.142 ; 2.642,20.168 2.845,20.168 ; 2.642,20.193 2.845,20.193 ; 2.642,20.218 2.845,20.218 ; 2.642,20.447 2.896,20.447 ; 2.667,20.244 2.87,20.244 ; 2.667,20.269 2.87,20.269 ; 2.667,20.295 2.87,20.295 ; 2.692,20.472 2.896,20.472 ; 2.718,20.498 2.896,20.498 ; 3.048,19.558 3.607,19.558 ; 3.048,19.583 3.632,19.583 ; 3.048,19.609 3.658,19.609 ; 3.048,19.634 3.683,19.634 ; 3.048,19.66 3.226,19.66 ; 3.073,19.533 3.581,19.533 ; 3.073,19.685 3.175,19.685 ; 3.073,19.71 3.124,19.71 ; 3.124,19.507 3.531,19.507 ; 3.2,19.482 3.429,19.482 ; 3.2,20.117 3.505,20.117 ; 3.2,20.142 3.454,20.142 ; 3.2,20.168 3.429,20.168 ; 3.2,20.193 3.404,20.193 ; 3.2,20.218 3.404,20.218 ; 3.2,20.244 3.404,20.244 ; 3.2,20.269 3.404,20.269 ; 3.2,20.295 3.404,20.295 ; 3.2,20.32 3.429,20.32 ; 3.226,20.066 3.581,20.066 ; 3.226,20.091 3.531,20.091 ; 3.226,20.345 3.454,20.345 ; 3.226,20.371 3.48,20.371 ; 3.251,20.041 3.632,20.041 ; 3.251,20.396 3.81,20.396 ; 3.277,20.015 3.658,20.015 ; 3.277,20.422 3.81,20.422 ; 3.302,19.99 3.683,19.99 ; 3.302,20.447 3.81,20.447 ; 3.327,20.472 3.81,20.472 ; 3.353,19.964 3.708,19.964 ; 3.378,19.939 3.708,19.939 ; 3.378,20.498 3.759,20.498 ; 3.429,19.66 3.708,19.66 ; 3.429,19.914 3.734,19.914 ; 3.454,19.888 3.734,19.888 ; 3.454,20.523 3.683,20.523 ; 3.48,19.685 3.708,19.685 ; 3.505,19.71 3.734,19.71 ; 3.505,19.736 3.734,19.736 ; 3.505,19.837 3.734,19.837 ; 3.505,19.863 3.734,19.863 ; 3.531,19.761 3.734,19.761 ; 3.531,19.787 3.734,19.787 ; 3.531,19.812 3.734,19.812 ; 3.658,20.371 3.785,20.371 ; 3.734,20.345 3.785,20.345

## Keep-outs
Keep-Out Layer:
  lines w0.3: 0.127,0 0.127,21.336 100.33,21.336 100.33,0 0.127,0

## Other copper
Top Layer:
  region net BGND: 31.369,15.494 30.861,14.986 31.877,14.986
  region net BGND: 51.562,2.794 49.911,2.794 50.8,3.683
  region net HGND: 56.261,2.413 55.499,1.651 57.15,1.651
  region net -5V0: 63.119,17.907 63.119,16.891 61.976,17.907
  pour cut-out: 100.076,21.209 91.313,21.209 91.313,0.254 100.076,0.254
Bottom Layer:
  region net NetQ10_3: 20.32,1.905 19.685,1.27 20.955,1.27
  region net NetC4_1: 71.12,13.335 67.056,13.335 67.056,8.763 71.12,8.763
  region net SGND: 61.087,13.589 64.897,13.589 64.897,8.636 61.087,8.636
  region net NetQ4_1: 48.895,7.874 49.403,8.382 49.403,7.366
  pour cut-out: 100.076,21.209 91.313,21.209 91.313,0.254 100.076,0.254

## Text inside footprints (layer, text, board x,y; h text height)
C1: Bottom Overlay "+" at 63.919,3.128 h1
C4: Bottom Overlay "+" at 67.843,10.338 h1 r180
C8: Bottom Overlay "+" at 12.446,11.078 h1
C12: Top Overlay "+" at 64.044,12.116 h1 r180
C13: Top Overlay "+" at 64.044,9.576 h1 r180
C15: Bottom Overlay "+" at 25.643,7.914 h1
C23: Bottom Overlay "+" at 37.338,8.209 h1
P1: Top Overlay "2" at 2.413,2.921 h1 r90; Top Overlay "1" at 4.953,3.429 h1 r90; Top Overlay "9" at 4.953,17.145 h1 r90; Top Overlay "10" at 2.413,17.145 h1 r90